# EAGLE board header_pcb (EAGLE 9.6.2)
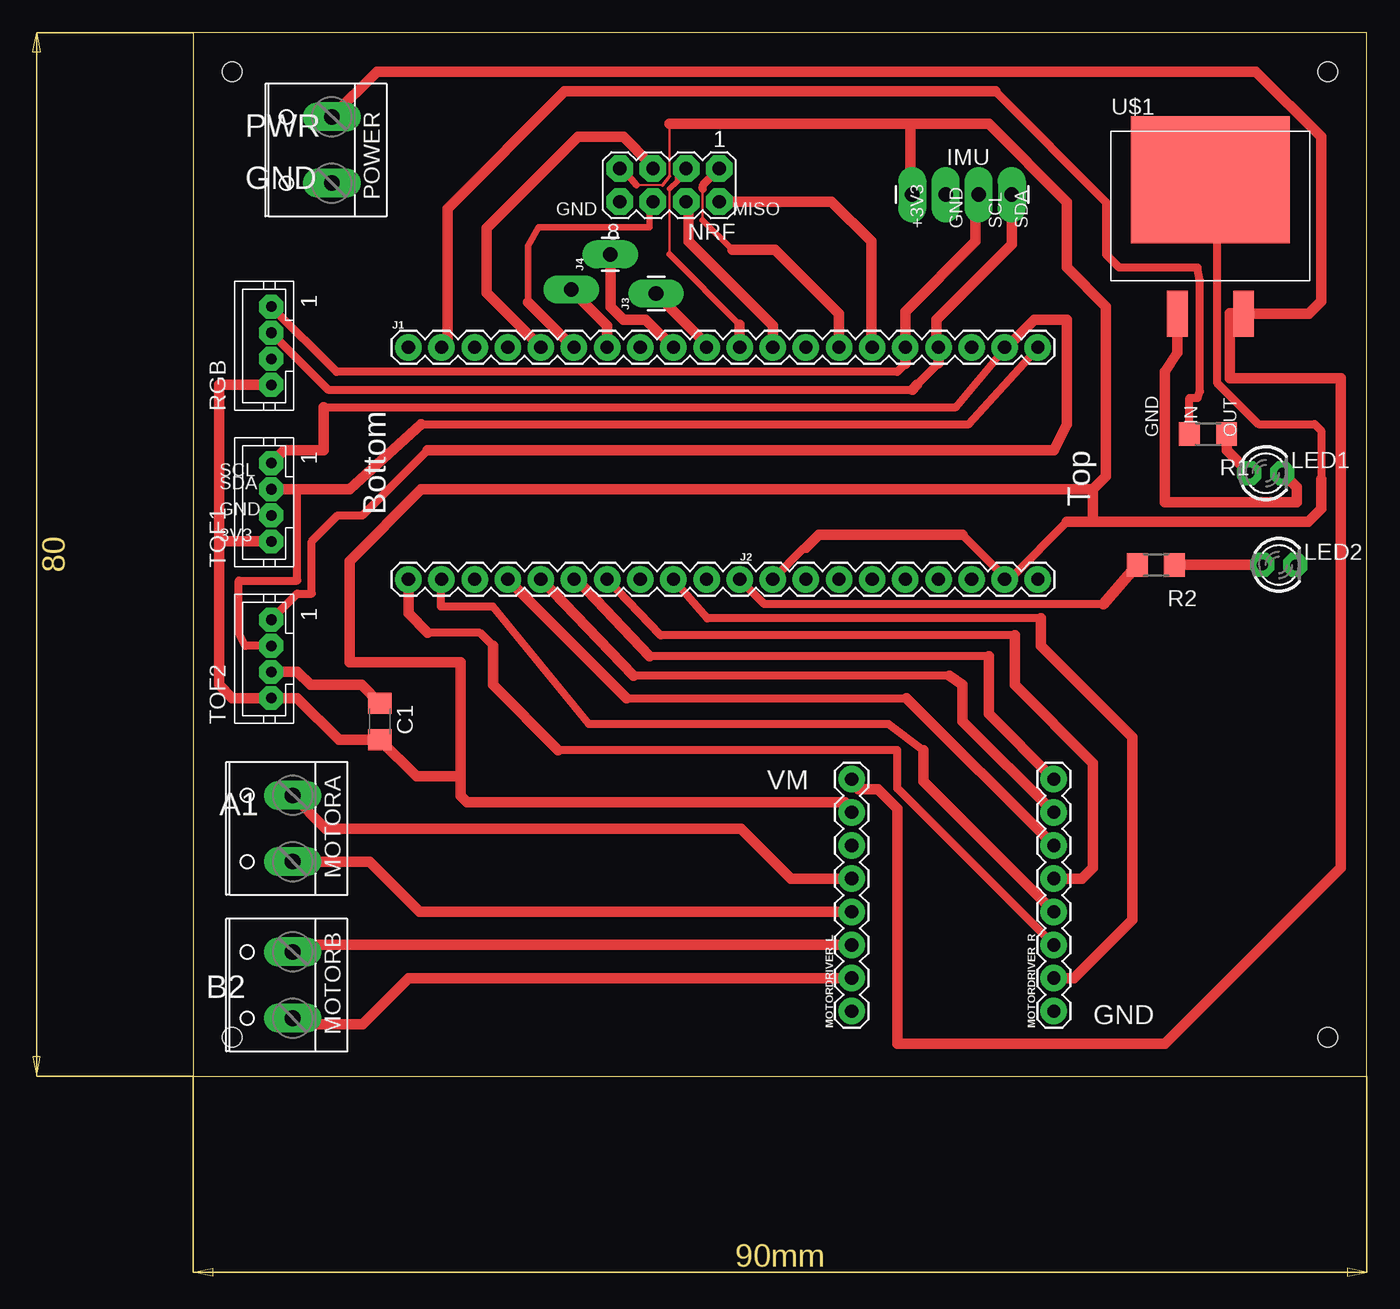
[diagram p0: board, top side]
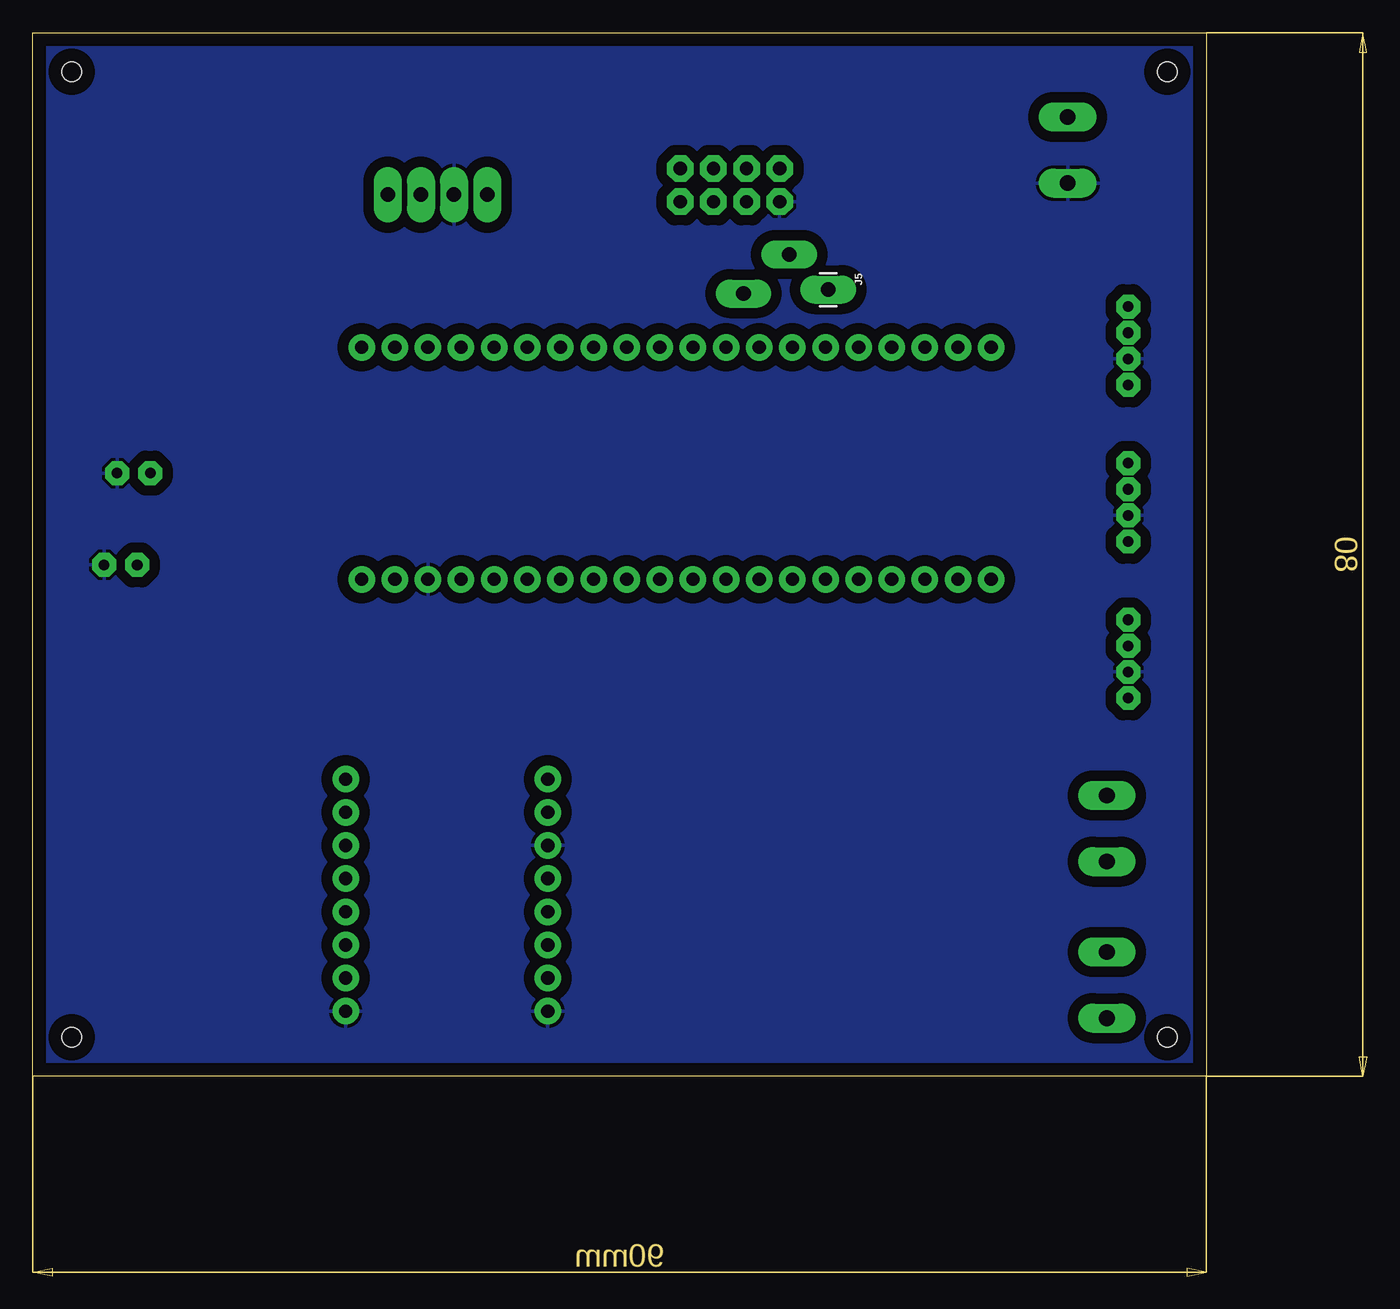
[diagram p1: board, bottom side, seen from below]

Size 90 x 80 mm. Coordinates in mm from the lower left corner, seen from the top.
Outline: 0,0 90,0 90,80 0,80 0,0
Copper layers (1*16): Top 0.035mm / dielectric 1.5mm / Bottom 0.035mm
Design rules "default *": minimum track width 6mil, minimum drill 0.35mm, track to track 6mil, track to pad 6mil, pad to pad 6mil, via to via 6mil, smd to smd 6mil, copper to edge 40mil, drill to drill 6mil, minimum pad ring 20mil, minimum via ring 8mil, stop-mask expansion 4mil, vias tented up to drill 0mil, thermal gap 10mil
Holes 1.5 mm at 3,77 3,3 87,3 87,77

## Footprints (pad centres in the part's own frame; a part is rotated, then mirrored left to right if it is on the bottom)
C1206 = smd 1.6 x 1.8: 1 -1.4,0; 2 1.4,0
1X04_LONGPADS = drill 1.118 pad 1.88 long: 1 0,0; 2 2.54,0; 3 5.08,0; 4 7.62,0
1X20 = drill 1.016 pad 1.88: 1 0,0; 2 2.54,0; 3 5.08,0; 4 7.62,0; 5 10.16,0; 6 12.7,0; 7 15.24,0; 8 17.78,0; 9 20.32,0; 10 22.86,0; 11 25.4,0; 12 27.94,0; 13 30.48,0; 14 33.02,0; 15 35.56,0; 16 38.1,0; 17 40.64,0; 18 43.18,0; 19 45.72,0; 20 48.26,0
1X01_LONGPAD = drill 1.118 pad 1.88 long: 1 0,0
LED3MM = drill 0.813 octagon: A -1.27,0; K 1.27,0
W237-132 = drill 1.194 long: 1 -2.54,-0.635; 2 2.54,-0.635
1X08 = drill 1.016 pad 1.88: 1 0,0; 2 2.54,0; 3 5.08,0; 4 7.62,0; 5 10.16,0; 6 12.7,0; 7 15.24,0; 8 17.78,0
MA04-2 = drill 1.016 octagon: 1 -3.81,-1.27; 2 -3.81,1.27; 3 -1.27,-1.27; 4 -1.27,1.27; 5 1.27,-1.27; 6 1.27,1.27; 7 3.81,-1.27; 8 3.81,1.27
R1206 = smd 1.6 x 1.803: 1 -1.422,0; 2 1.422,0
JST-PH4 = drill 0.813 pad 1.676 octagon: 1 3,0; 2 1,0; 3 -1,0; 4 -3,0
D2PAK = smd 1.6 x 3.505: GND -2.54,-2.54; VIN 2.54,-2.54 | smd 12.192 x 9.754: VOUT 0,7.722

## Placement (x,y rotation side)
C1  10uF  [C1206]  14.32,27.21 270 top
IMU  [1X04_LONGPADS]  62.77,67.58 180 top
J1  [1X20]  16.51,55.88 0 top
J2  [1X20]  16.51,38.1 0 top
J3  [1X01_LONGPAD]  35.5,60 90 top
J4  [1X01_LONGPAD]  32,63 90 top
J5  [1X01_LONGPAD]  29,60.3 270 bottom
LED1  [LED3MM]  82.25,46.24 0 top
LED2  [LED3MM]  83.25,39.21 0 top
MOTORA  [W237-132]  7,19 90 top
MOTORB  [W237-132]  7,7 90 top
MOTORDRIVER_L  [1X08]  50.5,5 90 top
MOTORDRIVER_R  [1X08]  66,5 90 top
NRF  [MA04-2]  36.53,68.31 180 top
POWER  [W237-132]  10,71 90 top
R1  330  [R1206]  77.82,49.24 180 top
R2  330  [R1206]  73.82,39.21 180 top
RGB  [JST-PH4]  6,56 90 top
TOF1  [JST-PH4]  6,44 90 top
TOF2  [JST-PH4]  6,32 90 top
U$1  LD1086  [D2PAK]  78,61 0 top

## Library data of the parts
C1 = rcl; SPICEPREFIX: C
IMU = SparkFun-Connectors; PROD_ID: CONN-09696
J1-J5 = SparkFun-Connectors
LED1 LED2 = led
MOTORA MOTORB POWER = con-wago-508; OC_FARNELL: unknown; OC_NEWARK: unknown
MOTORDRIVER_L MOTORDRIVER_R = SparkFun-Connectors; PROD_ID: CONN-08438
NRF = con-lstb; OC_FARNELL: unknown; OC_NEWARK: unknown
R1 R2 = rcl; SPICEPREFIX: R
RGB TOF1 TOF2 = jst-ph
U$1 = LD1086; AVAILABILITY: In Stock; DESCRIPTION: Linear Voltage Regulator IC Positive Fixed 1 Output 1.5A DPAK; MF: STMicroelectronics; MP: LD1086; PACKAGE: D2PAK STMicroelectronics; PRICE: None; PURCHASE-URL: https://pricing.snapeda.com/search/part/LD1086/?ref=eda

## Nets
+3V3: C1.2 IMU.4 J2.12 J2.19 MOTORDRIVER_L.7 NRF.7 RGB.4 TOF1.4 TOF2.4 U$1.VOUT
+6V: MOTORDRIVER_L.8 POWER.2 U$1.VIN
A1_MOTOR1: MOTORA.2 MOTORDRIVER_L.5
A2_MOTOR1: MOTORA.1 MOTORDRIVER_L.4
B1_MOTOR2: MOTORB.1 MOTORDRIVER_L.2
B2_MOTOR2: MOTORB.2 MOTORDRIVER_L.3
CE: J1.6 NRF.6
CSN: J1.5 NRF.5
GND: C1.1 IMU.3 J2.18 LED1.K LED2.K MOTORDRIVER_L.1 MOTORDRIVER_L.6 MOTORDRIVER_R.1 NRF.8 POWER.1 RGB.3 TOF1.3 TOF2.3 U$1.GND
GPIO1: J1.10 J3.1
GPIO2: J1.9 J4.1
GPIO3: J1.7 J5.1
IN1_MOTOR2: J2.2 MOTORDRIVER_R.4
IN1_MOTORA: J2.4 MOTORDRIVER_R.6
IN2_MOTOR2: J2.1 MOTORDRIVER_R.3
IN2_MOTORA: J2.5 MOTORDRIVER_R.7
IRQ: J1.14 NRF.1
LED_COMM: J2.11 R2.2
LED_PWR: J1.2 R1.2
MISO: J1.15 NRF.2
MOSI: J1.11 NRF.3
N$1: LED1.A R1.1
N$2: LED2.A R2.1
PWM_MOTOR2: J2.9 MOTORDRIVER_R.2
PWM_MOTORA: J2.6 MOTORDRIVER_R.8
SCK: J1.12 NRF.4
SCL0: J1.19 TOF1.1 TOF2.1
SCL1: IMU.2 J1.16 RGB.1
SDA0: J1.20 TOF1.2 TOF2.2
SDA1: IMU.1 J1.17 RGB.2
STBY: J2.7 MOTORDRIVER_R.5

## Tracks (layer width: path | path; a pad name or v marks a point on that pad's centre or on a via)
+3V3
  Top 0.152: 36,68.3 34,68.3
  Top 0.203: 36.53,73 36.53,69
  Top 0.254: 36.53,69 36,68.3
  Top 0.508: 34,68.3 33,69.5
  Top 0.61: 78.5,67.5 78.5,53.18 81.68,50 86,50 86.5,49.5 86.5,45.75 | 59,41.5 62.23,38.27 | 62.23,38.27 J2.19 | 67,42.5 62.77,38.27 62.23,38.27 | J2.12 46.85,40.5 47,40.5
  Top 0.813: 59,41.5 48,41.5 47,40.5 | 36.53,73 55,73 | 33,69.5 NRF.7 | 69,45 17.5,45 12,39.5 12,31.75 20.5,31.75 20.5,23 | MOTORDRIVER_L.7 50.5,20.5 50,21 21,21 20.5,21.5 20.5,23 | 78.5,67.5 78,68.5 U$1.VOUT | 86.5,45.75 86.5,43.5 85.5,42.5 69,42.5 | RGB.4 2,53 2,41 | 2,41 2,30 3,29 TOF2.4 8,29 11.19,25.81 C1.2 17.13,23 20.5,23 | 69,42.5 67,42.5 | 69,45 69,42.5 | TOF1.4 2,41 | IMU.4 55,67.73 55,73 | 69,45 70,46 70,59 67,62 67,67 61,73 55,73
+6V
  Top 0.813: MOTORDRIVER_L.8 50.5,22.5 51,22 52.5,22 54,20.5 54,2.5 74.5,2.5 88,16 88,53.5 79.5,53.5 79.5,58.5 80.5,58.5 U$1.VIN 85.54,58.46 86.5,59.42 86.5,72 81.5,77 17.65,77 14.1,77 POWER.2
A1_MOTOR1
  Top 0.813: MOTORDRIVER_L.5 45.84,15.16 42,19 10.18,19 MOTORA.2
A2_MOTOR1
  Top 0.813: MOTORDRIVER_L.4 17.38,12.62 13.54,16.46 MOTORA.1
B1_MOTOR2
  Top 0.813: MOTORDRIVER_L.2 16.54,7.54 13,4 8.1,4 MOTORB.1
B2_MOTOR2
  Top 0.813: MOTORDRIVER_L.3 8.18,10.08 MOTORB.2
CE
  Top 0.508: NRF.6 35,67 35,65.1 26.5,65.1 25.67,63.67 25.67,59.33
  Top 0.813: J1.6 29.12,55.88 25.67,59.33
CSN
  Top 0.813: NRF.5 35,70 33,72 29.5,72 22.5,65 22.5,60.05 J1.5
GND
  Top 0.813: U$1.GND 75.46,55.46 74.5,54 74.5,44 84.62,44 84.62,45.14 LED1.K | C1.1 12.93,30 9,30 8,31 TOF2.3
  pour Bottom (isolate 0.813): 0,80 0,0 90,0 90,80
GPIO1
  Top 0.813: J1.10 39.37,56.13 J3.1
GPIO2
  Top 0.813: J1.9 34.71,58 33,58 32,59 J4.1
GPIO3
  Top 0.813: J5.1 31.75,57.55 J1.7
IN1_MOTOR2
  Top 0.61: 56,25 53.35,27 30.35,27 23,36 19,36 19,38.05 J2.2
  Top 0.813: MOTORDRIVER_R.4 56,22.62 56,25
IN1_MOTORA
  Top 0.152: MOTORDRIVER_R.6 66,17
  Top 0.61: 33.23,29 54.7,29
  Top 0.813: 33.23,29 J2.4 | 54.7,29 MOTORDRIVER_R.6
IN2_MOTOR2
  Top 0.61: MOTORDRIVER_R.3 54,22.08 54,25 28,25 | 23,33 22,34 18,34
  Top 0.813: 28,25 23,30 23,33 | 18,34 16.51,35.49 J2.1
IN2_MOTORA
  Top 0.61: 58,30.7 33.77,30.7
  Top 0.813: MOTORDRIVER_R.7 59,27.24 59,30 58,30.7 | 33.77,30.7 J2.5
IRQ
  Top 0.203: 39.07,65.63 39.07,68
  Top 0.508: 39.07,65.63 41.36,63.36
  Top 0.61: 39.07,68 39.1,68.34 NRF.1
  Top 0.813: 41.36,63.36 44.63,63.36 49.53,58.47 J1.14
LED_COMM
  Top 0.61: J2.11 43.81,36.2 69.79,36.2
  Top 0.813: R2.2 69.79,36.2
LED_PWR
  Top 0.61: 61.5,75.5 70,67 70,63 71,62 77,62 77.2,61 77.2,52.5 77,52 76.4,52 R1.2
  Top 0.813: J1.2 19.5,56 19.5,66.5 28.5,75.5 61.5,75.5
MISO
  Top 0.813: J1.15 52,56 52,59 52,64 48.96,67.04 NRF.2
MOSI
  Top 0.203: 36.53,63.01 36.53,68.02
  Top 0.406: NRF.3 37.14,68.92 37.14,68.61 36.53,68.02
  Top 0.508: 41.91,57.6 36.53,63.01
  Top 0.813: J1.11 41.91,57.6
N$1
  Top 0.813: LED1.A 79.24,47.98 R1.1
N$2
  Top 0.813: LED2.A R2.1
PWM_MOTOR2
  Top 0.61: J2.9 39.43,35.1 65,35.1
  Top 0.813: MOTORDRIVER_R.2 67.54,7.54 72,12 72,26 65,33 65,35.1
PWM_MOTORA
  Top 0.61: 61,32.2 35,32.2
  Top 0.813: 35,32.2 29.5,38 J2.6 | 61,32.2 61,27.78 MOTORDRIVER_R.8
SCK
  Top 0.813: J1.12 44.45,57.55 38,64 38,67 NRF.4
SCL0
  Top 0.61: 62,55.5 58.5,51.3 10,51.3 | TOF2.1 8,37 9.1,37 9.1,41 11.1,43 13,43 18,48
  Top 0.813: 10,51.3 10,48 7,48 TOF1.1 | J1.19 62,55.5 64.5,58 67,58 67,50 66,48 18,48
SCL1
  Top 0.152: IMU.2 60,67.35
  Top 0.61: 54.61,54.61 54,54 11,54 RGB.1
  Top 0.813: 54.61,54.61 J1.16 54.61,58.61 60,64 60,67.35
SDA0
  Top 0.61: 64.5,55.5 59.5,50 17.5,50 | TOF2.2 4,33 3.5,34 3.5,38 8,38 8,45
  Top 0.813: 17.5,50 12,45 8,45 TOF1.2 | 64.5,55.5 J1.20
SDA1
  Top 0.152: 57,56.03 J1.17
  Top 0.61: RGB.2 10.35,52.65 55.15,52.65 | 55.5,53 57.15,54.65
  Top 0.813: 55.15,52.65 55.5,53 | 57.15,54.65 J1.17 | IMU.1 62.77,63.77 57,58 57,56.03
STBY
  Top 0.61: J2.7 35.85,33.8 63,33.8
  Top 0.813: 63,33.8 63,30 69,24 69,16 68.16,15.16 MOTORDRIVER_R.5

## Text on the board
tNames: PWR | GND | GND | MISO | +3V3 | GND | SCL | SDA | Bottom | IN | GND | OUT | Top | SCL | SDA | GND | 3V3 | VM | A1 | B2 | GND